# Altium PCB PCB1_1.pcbdoc
Units mil, origin at the board's own origin, x right, y up, seen from the top; angles counter-clockwise.
Board outline 3530.9 x 1977.12 mil, 4 copper layers (Top Layer, Inner1, Inner2, Bottom Layer); 80 components, 53 nets, 345 pads, 105 vias.
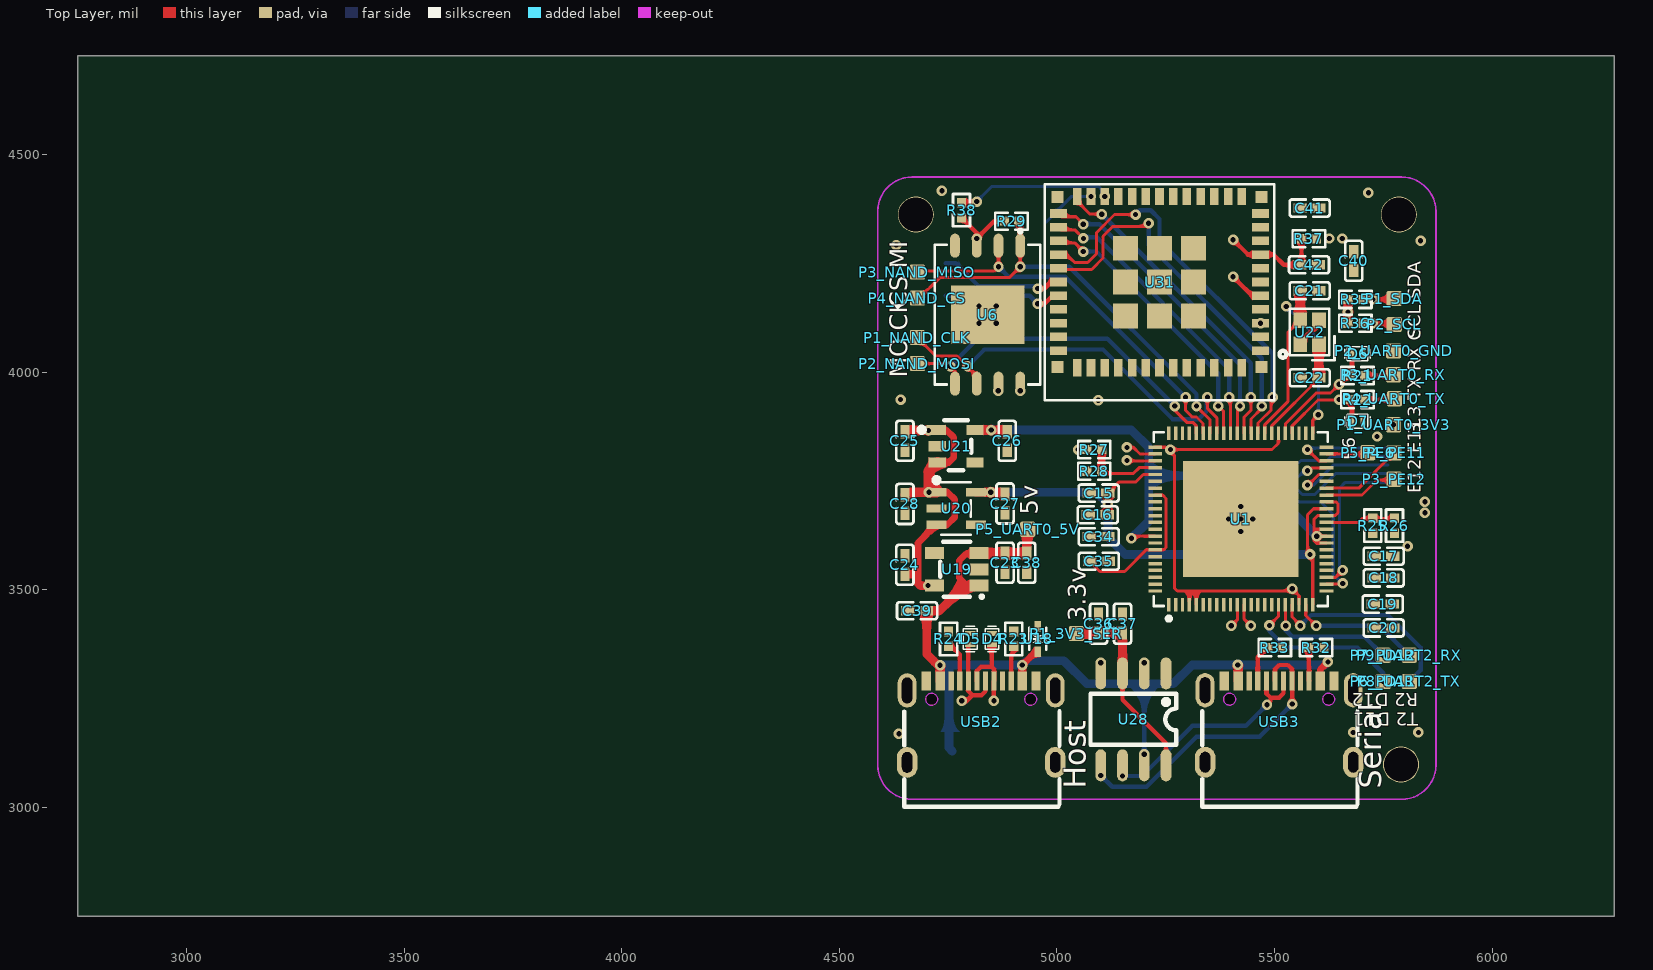
[diagram p0: Top Layer view]
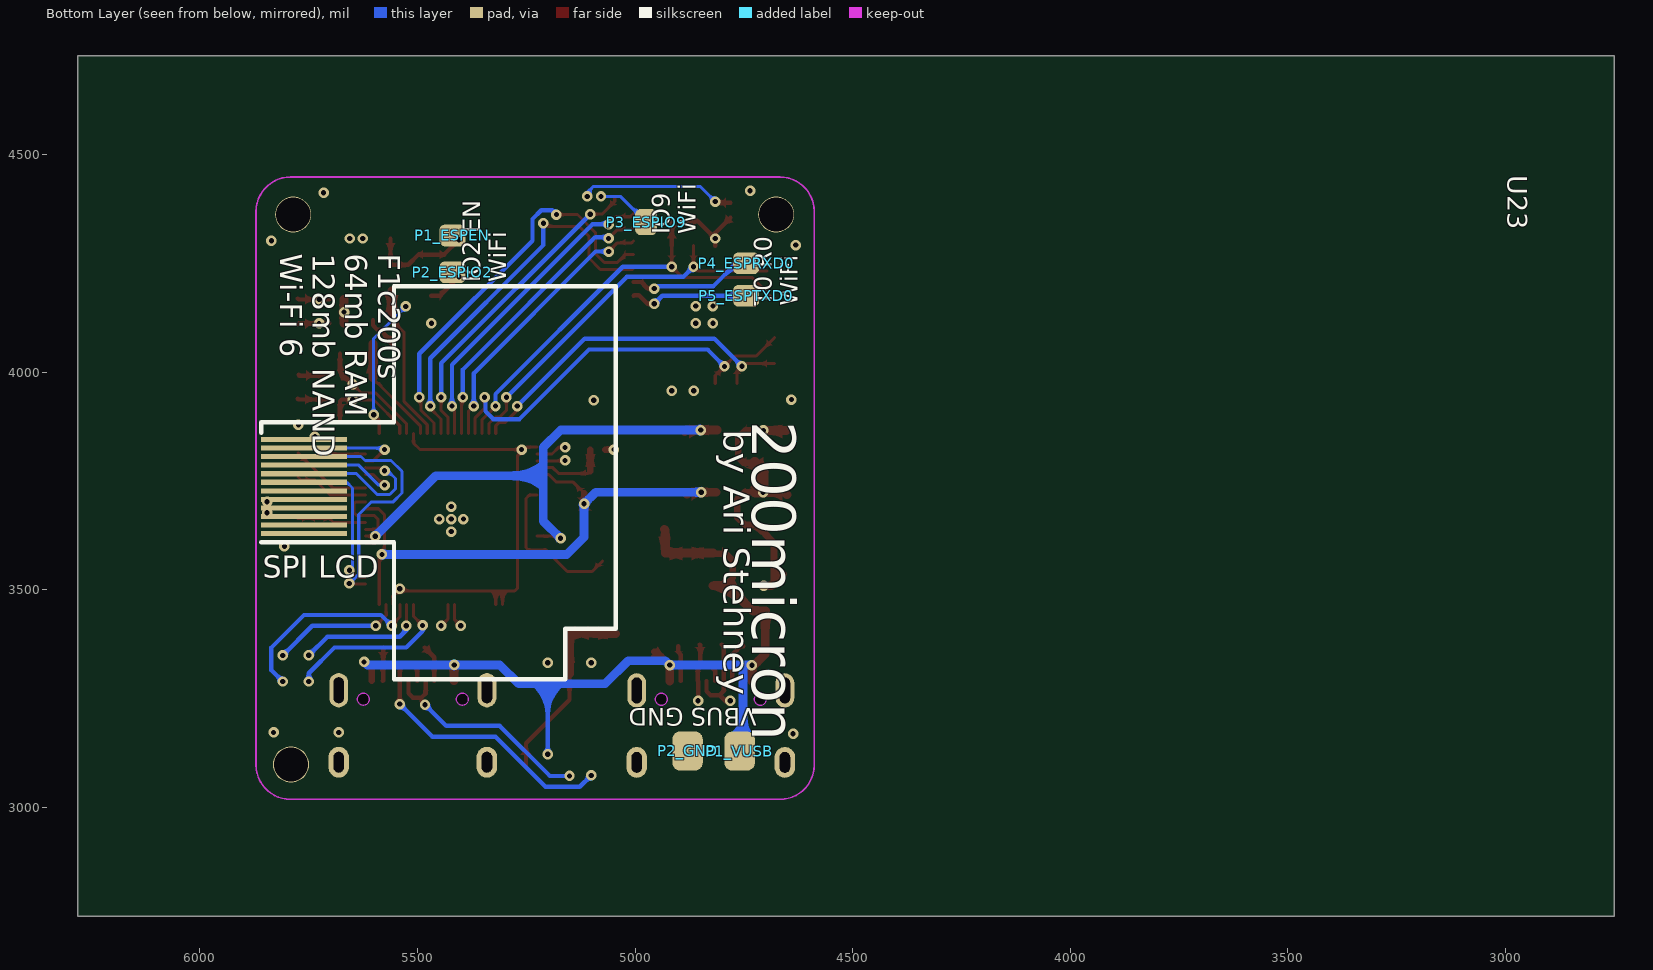
[diagram p1: Bottom Layer view, seen from below]
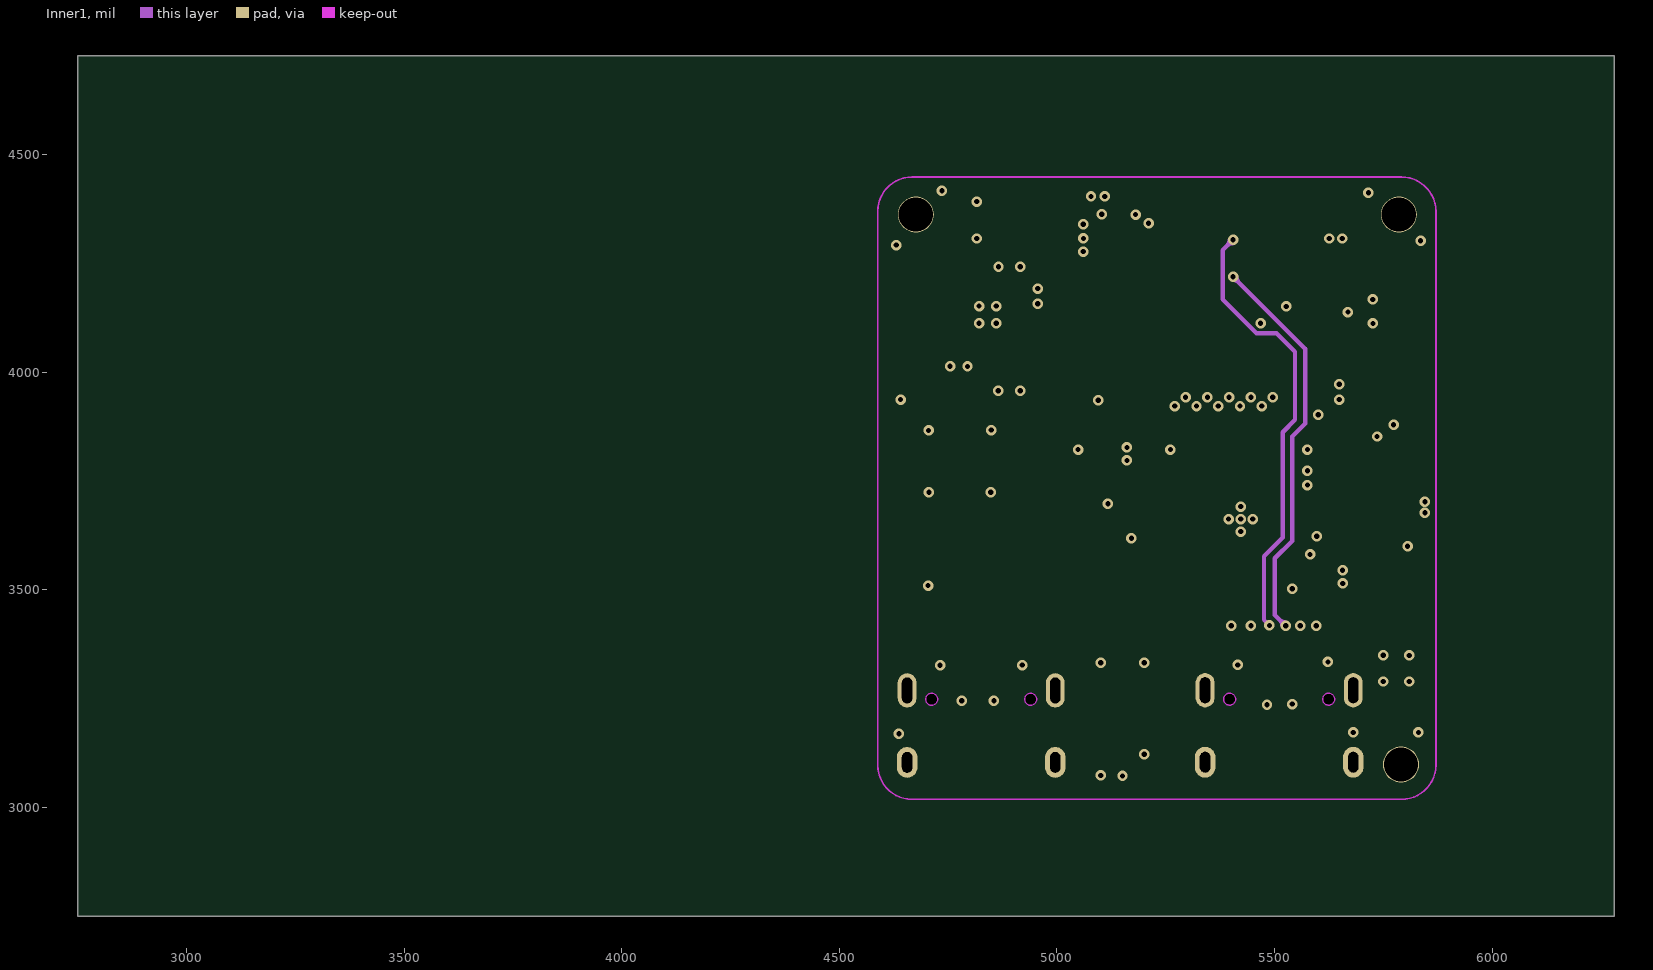
[diagram p2: Inner1]
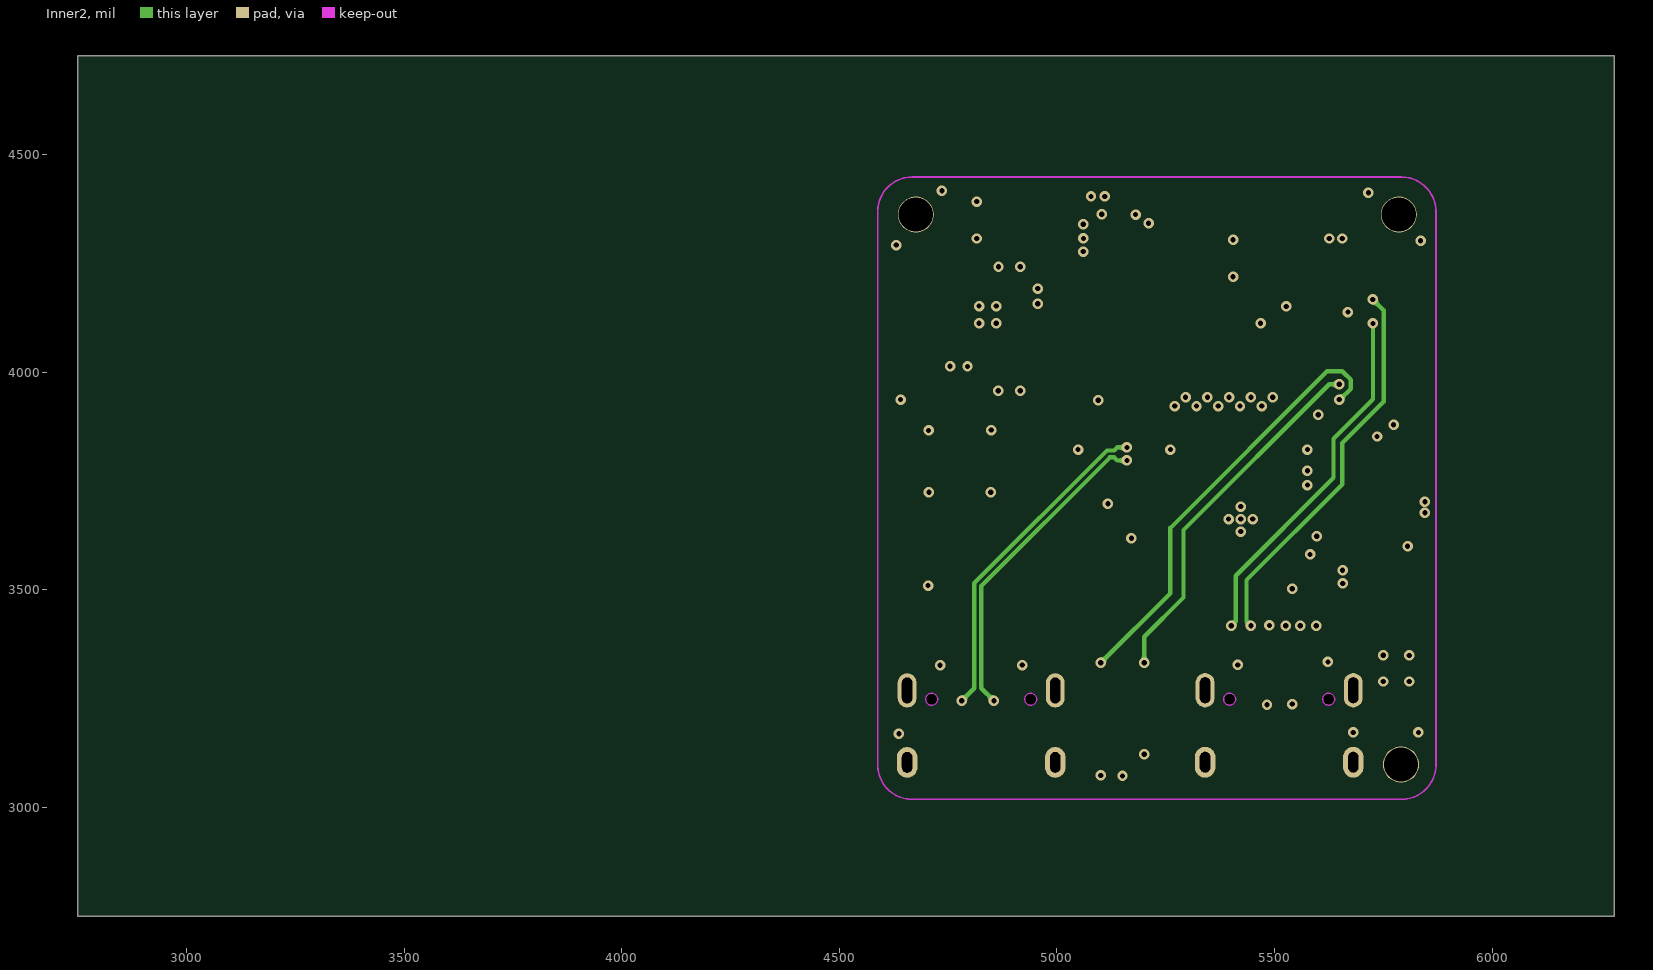
[diagram p3: Inner2]

## Layer stack, top to bottom
Top Layer: signal copper (thickness not stored)
Dielectric: dielectric 12.6, FR-4, Dk 4.8
Inner1: signal copper (thickness not stored)
Dielectric: dielectric 12.6, FR-4, Dk 4.8
Inner2: signal copper (thickness not stored)
Dielectric: dielectric 12.6, FR-4, Dk 4.8
Bottom Layer: signal copper (thickness not stored)

## Board outline
6280.9,2750 2750,2750 2750,4727.12 6280.9,4727.12

## Design rules (kind name [scope] priority, off if disabled: settings)
BoardOutlineClearance copperThickness1oz [All] p0: genericclearance=10 ignorepadtopadclearanceinfootprint=FALSE except(0: Arc-SplitContinuation Track-SplitContinuation SMDPad-SplitContinuation THPad-SplitContinuation Via-SplitContinuation Fill-SplitContinuation Poly-SplitContinuation Region-SplitContinuation Text-SplitContinuation; 6: Track-CutoutEdge SMDPad-CutoutEdge THPad-CutoutEdge Via-CutoutEdge Region-CutoutEdge; 11.8: Track-OutlineEdge SMDPad-OutlineEdge THPad-OutlineEdge Via-OutlineEdge Fill-OutlineEdge Region-OutlineEdge Poly-OutlineEdge Text-OutlineEdge Fill-CutoutEdge)
BoardOutlineClearance copperThickness2oz [All] p0: genericclearance=10 ignorepadtopadclearanceinfootprint=FALSE except(0: Arc-SplitContinuation Track-SplitContinuation SMDPad-SplitContinuation THPad-SplitContinuation Via-SplitContinuation Fill-SplitContinuation Poly-SplitContinuation Region-SplitContinuation Text-SplitContinuation; 6: Track-CutoutEdge SMDPad-CutoutEdge THPad-CutoutEdge Via-CutoutEdge Region-CutoutEdge; 11.8: Track-OutlineEdge SMDPad-OutlineEdge THPad-OutlineEdge Via-OutlineEdge Fill-OutlineEdge Region-OutlineEdge Poly-OutlineEdge Text-OutlineEdge Fill-CutoutEdge)
Clearance copperThickness1oz [(InNet('GND') OR InNet('1V1') OR InNet('2V5') OR InNet('HOSCO') OR InNet('HOSCI') OR InNet('3V3') OR InNet('USB_DP') OR InNet('USB_DM') OR InNet('UART0_RX') OR InNet('UART0_TX') OR InNet('SPI_LCD_RESET') OR InNet('SPI_LCD_CD') OR InNet('SPI1_MOSI') OR InNet('SPI1_CLK') OR InNet('SPI1_CS') OR InNet('SPI0_CLK') OR InNet('SPI0_MOSI') OR InNet('$1N1772') OR InNet('SPI0_MISO') OR InNet('$1N1777') OR InNet('SPI0_CS') OR InNet('$1N4860') OR InNet('$1N4861') OR InNet('SVREF') OR InNet('RESET') OR InNet('SPI1_MISO') OR InNet('SD_D2') OR InNet('SD_D3') OR InNet('SD_CMD') OR InNet('SD_CK') OR InNet('SD_D0') OR InNet('SD_D1') OR InNet('WIFI_EN') OR InNet('VBUS') OR InNet('PMIC_INT') OR InNet('$1N22407') OR InNet('$1N22408') OR InNet('USB_SERIAL_DM') OR InNet('USB_SERIAL_DP') OR InNet('3V3_SER') OR InNet('I2C0_SCL') OR InNet('I2C0_SDA') OR InNet('GPIO_PE12') OR InNet('GPIO_PE11') OR InNet('GPIO_PE6') OR InNet('UART2_TX') OR InNet('UART2_RX') OR InNet('C6_IO2') OR InNet('C6_EN') OR InNet('$1N25036') OR InNet('C6_IO9') OR InNet('C6_RXD0') OR InNet('C6_TXD0'))] p1: gap=7 ignorepadtopadclearanceinfootprint=FALSE except(4: Track-Track; 6: Track-SMDPad SMDPad-SMDPad Track-THPad SMDPad-THPad THPad-THPad Track-Via SMDPad-Via THPad-Via Via-Via SMDPad-Fill THPad-Fill Via-Fill Fill-Fill Track-Region SMDPad-Region THPad-Region Via-Region Region-Region Track-Poly SMDPad-Poly THPad-Poly Via-Poly Fill-Poly Region-Poly Poly-Poly Track-Text SMDPad-Text THPad-Text Via-Text Fill-Text Region-Text Poly-Text Text-Text; 6.9: Track-Hole SMDPad-Hole THPad-Hole Via-Hole Fill-Hole Region-Hole Poly-Hole Text-Hole Sheet-Hole; 11.8: Track-Fill Fill-Region Track-Sheet SMDPad-Sheet THPad-Sheet Via-Sheet Fill-Sheet Region-Sheet Poly-Sheet Text-Sheet)
Clearance copperThickness2oz [All] p1: gap=7 ignorepadtopadclearanceinfootprint=FALSE except(6: Track-SMDPad SMDPad-SMDPad Track-THPad SMDPad-THPad THPad-THPad Track-Via SMDPad-Via THPad-Via Via-Via SMDPad-Fill THPad-Fill Via-Fill Fill-Fill Track-Region SMDPad-Region THPad-Region Via-Region Region-Region Track-Poly SMDPad-Poly THPad-Poly Via-Poly Fill-Poly Region-Poly Poly-Poly Track-Text SMDPad-Text THPad-Text Via-Text Fill-Text Region-Text Poly-Text Text-Text; 6.9: Track-Hole SMDPad-Hole THPad-Hole Via-Hole Fill-Hole Region-Hole Poly-Hole Text-Hole Sheet-Hole; 8: Track-Track; 11.8: Track-Fill Fill-Region Track-Sheet SMDPad-Sheet THPad-Sheet Via-Sheet Fill-Sheet Region-Sheet Poly-Sheet Text-Sheet)
DiffPairsRouting differentialPair [All] p1: maxuncoupledlength=10 minlimit=6 maxlimit=6 mostfreqgap=6 toplayer_minwidth=5 toplayer_prefwidth=10 toplayer_maxwidth=100 bottomlayer_minwidth=5 bottomlayer_prefwidth=10 bottomlayer_maxwidth=100 midlayer1_minwidth=5 midlayer1_prefwidth=10 midlayer1_maxwidth=100 midlayer2_minwidth=5 midlayer2_prefwidth=10 midlayer2_maxwidth=100
PasteMaskExpansion pasteMaskExpansion [All] p1: expansion=0
PlaneConnect innerPlane [All] p1: planeconnectstyle=Relief reliefexpansion=20 reliefentries=4 reliefconductorwidth=10 reliefairgap=10
PolygonConnect copperRegion [All] p1: connectstyle=Direct reliefentries=4 reliefconductorwidth=10 polygonreliefangle="90 Angle" airgapwidth=10
RoutingVias viaSize [All] p1: viastyle="Through Hole" holewidth=12.0078 minholewidth=11.811 maxholewidth=248.0314 width=24.0158 minwidth=19.685 maxwidth=393.7008
SolderMaskExpansion solderMaskExpansion [All] p1: useseparateexpansions=TRUE expansion=2 expansionbottom=2
Width copperThickness1oz [All] p1: maxlimit=100 minlimit=5 preferedwidth=10
Width copperThickness2oz [All] p1: maxlimit=100 minlimit=8 preferedwidth=10

## Components (designator, comment, footprint, x,y, rotation, side; value= is the part's Value field where it differs from the comment)
C15 "CAP_0402" C0402 5095.9,3722.12 r180 top
C16 "CAP_0402" C0402 5093.82,3672.12 r180 top
C17 "CAP_0402" C0402 5750.9,3577.12 r0 top
C18 "CAP_0402" C0402 5750.9,3527.12 r0 top
C19 "CAP_0402" C0402 5748.82,3467.12 r0 top
C20 "CAP_0402" C0402 5750.9,3412.12 r0 top
C21 "CAP_0402" C0402 5580.9,4187.12 r0 top
C22 "CAP_0402" C0402 5580.9,3987.12 r180 top
C23 "CAP_0402" C0402 4880.9,3562.12 r270 top
C24 "CAP_0402" C0402 4650.9,3557.12 r90 top
C25 "CAP_0402" C0402 4650.9,3842.12 r270 top
C26 "CAP_0402" C0402 4885.9,3842.12 r270 top
C27 "CAP_0402" C0402 4880.9,3698.16 r270 top
C28 "CAP_0402" C0402 4650.9,3697.12 r270 top
C34 "CAP_0402" C0402 5095.9,3622.12 r180 top
C35 "CAP_0402" C0402 5096.62,3565.67 r180 top
C36 "CAP_0402" C0402 5095.9,3422.12 r90 top
C37 "CAP_0402" C0402 5150.9,3422.12 r90 top
C38 "CAP_0402" C0402 4930.9,3562.12 r270 top
C39 "CAP_0402" C0402 4678.7,3451.54 r180 top
C40 "CAP_0402" C0402 5682.36,4255.66 r270 top
C41 "CAP_0402" C0402 5580.9,4377.12 r180 top
C42 "CAP_0402" C0402 5579.36,4246.59 r0 top
D4 "LESD8D3.3CAT5G_C172409" SOD-882_L1.0-W0.6-BI 4851.14,3386.88 r270 top
D5 "LESD8D3.3CAT5G_C172409" SOD-882_L1.0-W0.6-BI 4801.14,3386.88 r270 top
D6 "LESD8D3.3CAT5G_C172409" SOD-882_L1.0-W0.6-BI 5690.9,4042.12 r180 top
D7 "LESD8D3.3CAT5G_C172409" SOD-882_L1.0-W0.6-BI 5690.9,3887.12 r180 top
P1_3V3_SER "PAD 1.5x1.5" FCPAD_1.5_1.0mm#1 5044.9,3404.17 r0 top
P1_ESPEN "PAD 1.5x1.5" FCPAD_1.5_1.0mm#2 5414.89,4314.17 r270 bottom
P1_NAND_CLK "PAD 1.5x1.5" FCPAD_1.5_1.0mm#1 4679.56,4084.41 r0 top
P1_SDA "PAD 1.5x1.5" FCPAD_1.5_1.0mm#1 5775.11,4174.23 r0 top
P1_UART0_3V3 "PAD 1.5x1.5" FCPAD_1.5_1.0mm#1 5768.7,3878.91 r90 top
P1_VUSB "PAD 1.5x1.5" FCPAD_1.5_1.0mm#3 4759.9,3134.17 r180 bottom
P2_ESPIO2 "PAD 1.5x1.5" FCPAD_1.5_1.0mm#2 5414.89,4229.49 r270 bottom
P2_GND "PAD 1.5x1.5" FCPAD_1.5_1.0mm#3 4879.58,3134.49 r180 bottom
P2_NAND_MOSI "PAD 1.5x1.5" FCPAD_1.5_1.0mm#1 4679.56,4024.73 r0 top
P2_SCL "PAD 1.5x1.5" FCPAD_1.5_1.0mm#1 5775.11,4114.54 r0 top
P2_UART0_GND "PAD 1.5x1.5" FCPAD_1.5_1.0mm#1 5768.7,4048.91 r90 top
P3_ESPIO9 "PAD 1.5x1.5" FCPAD_1.5_1.0mm#2 4974.9,4349.8 r180 bottom
P3_NAND_MISO "PAD 1.5x1.5" FCPAD_1.5_1.0mm#1 4679.56,4235.04 r0 top
P3_PE12 "PAD 1.5x1.5" FCPAD_1.5_1.0mm#1 5774.9,3759.17 r0 top
P3_UART0_RX "PAD 1.5x1.5" FCPAD_1.5_1.0mm#1 5768.39,3993.91 r90 top
P4_ESPRXD0 "PAD 1.5x1.5" FCPAD_1.5_1.0mm#2 4739.89,4250.12 r270 bottom
P4_NAND_CS "PAD 1.5x1.5" FCPAD_1.5_1.0mm#1 4679.56,4175.36 r0 top
P4_PE11 "PAD 1.5x1.5" FCPAD_1.5_1.0mm#1 5774.9,3819.49 r0 top
P4_UART0_TX "PAD 1.5x1.5" FCPAD_1.5_1.0mm#1 5770.7,3938.91 r90 top
P5_ESPTXD0 "PAD 1.5x1.5" FCPAD_1.5_1.0mm#2 4739.89,4175.43 r270 bottom
P5_PE6 "PAD 1.5x1.5" FCPAD_1.5_1.0mm#1 5714.9,3819.8 r0 top
P5_UART0_5V "PAD 1.5x1.5" FCPAD_1.5_1.0mm#1 4928.01,3638.91 r90 top
P6_PD11 "PAD 1.5x1.5" FCPAD_1.5_1.0mm#1 5749.9,3294.17 r0 top
P7_PD12 "PAD 1.5x1.5" FCPAD_1.5_1.0mm#1 5749.9,3354.49 r0 top
P8_UART2_TX "PAD 1.5x1.5" FCPAD_1.5_1.0mm#1 5809.9,3294.17 r0 top
P9_UART2_RX "PAD 1.5x1.5" FCPAD_1.5_1.0mm#1 5809.9,3354.49 r0 top
R21 "Res_0402" R0402 5690.9,3992.12 r0 top
R22 "Res_0402" R0402 5690.9,3937.12 r0 top
R23 "Res_0402" R0402 4901.14,3386.88 r90 top
R24 "Res_0402" R0402 4751.14,3386.88 r270 top
R25 "Res_0402" R0402 5725.9,3647.12 r270 top
R26 "Res_0402" R0402 5775.9,3647.12 r90 top
R27 "Res_0402" R0402 5085.9,3822.12 r180 top
R28 "Res_0402" R0402 5085.9,3772.12 r0 top
R29 "Res_0402" R0402 4895.9,4347.12 r0 top
R32 "Res_0402" R0402 5595.9,3367.12 r0 top
R33 "Res_0402" R0402 5500.9,3367.12 r180 top
R35 "Res_0402" R0402 5685.9,4167.12 r180 top
R36 "Res_0402" R0402 5685.9,4112.12 r0 top
R37 "Res_0402" R0402 5579.36,4306.54 r0 top
R38 "Res_0402" R0402 4780.9,4372.12 r270 top
U1 "F1C200S" QFN-88_L10.0-W10.0-P0.40-BL-EP6.75 5422.66,3662.49 r0 top
U6 "W25N01GVZEIG" WSON-8_L8.0-W6.10-P1.27-BL-EP 4840.9,4132.12 r180 top
U18 "LESD5D5.0CT1G_C7433850" SOD-523_L1.2-W0.8-LS1.6-BI 4956.14,3386.88 r270 top
U19 "XC6210B332MR" TSOT-23-5_L2.9-W1.6-P0.95-LS2.8-BR 4770.01,3546.86 r0 top
U20 "TLV71311PDBVR" SOT-23-5_L3.0-W1.7-P0.95-LS2.8-BL 4768.51,3686.71 r270 top
U21 "TLV70225DBVR" SOT-23-5_L2.9-W1.6-P0.95-LS2.8-BR 4768.4,3829.62 r180 top
U22 "ECS-240-12-37B-CKY-TR" CRYSTAL-SMD_4P-L2.0-W1.6-BL 5580.9,4092.12 r90 top
U23 "HS20HS072RX" OLED-SMD_HS20HS072RX 5760.9,3737.12 r270 bottom
U28 "PL2303GL" SOP-8_L4.9-W3.9-P1.27-LS6.0-BL 5175.9,3202.12 r180 top
U31 "ESP32-C6-MINI-1U-H4" WIFIM-SMD_61P-L13.2-W12.5-P0.80 5235.9,4207.12 r180 top
USB2 "TYPE-C 16PIN 2MD(073)" USB-C-SMD_TYPE-C-6PIN-2MD-073 4826.14,3196.88 r0 top
USB3 "TYPE-C 16PIN 2MD(073)" USB-C-SMD_TYPE-C-6PIN-2MD-073 5510.9,3197.12 r0 top

## Footprints (in the part's own frame and the unit in brackets; to place one, negate y for a bottom-side part, rotate by r counter-clockwise, add the part's x,y. Pads: shape width x height; smd on the part's side, far side on the other; paste and mask are expansions set on the pad)
C0402 [mm]
  rect 0.79x0.54 smd: 1(-0.545,0) 2(0.545,0)
  silkscreen extent -1.17,-0.5 1.17,0.5
CRYSTAL-SMD_4P-L2.0-W1.6-BL [mm]
  rect 0.9x0.8 smd: 1(-0.7,-0.55) 2(0.7,-0.55) 3(0.7,0.55) 4(-0.7,0.55)
  silkscreen extent -1.65,-1.45 1.35,1.15
FCPAD_1.5_1.0mm#1 [mil]
  rrect25% 35x35 smd: 1(0,-5)
FCPAD_1.5_1.0mm#2 [mil]
  rrect50% 50x60 smd: 1(0,-5)
FCPAD_1.5_1.0mm#3 [mil]
  rrect50% 70x90 smd: 1(0,-5)
OLED-SMD_HS20HS072RX [mm]
  rect 0.3x5 smd: 1(-2.75,0) 2(-2.25,0) 3(-1.75,0) 4(-1.25,0) 5(-0.75,0) 6(-0.25,0) 7(0.25,0) 8(0.75,0) 9(1.25,0) 10(1.75,0) 11(2.25,0) 12(2.75,0)
  silkscreen extent -11.7,-2.5 11.25,18.2
QFN-88_L10.0-W10.0-P0.40-BL-EP6.75 [mm]
  rect 0.2x0.8 smd: 1(-4.2,-5) 2(-3.8,-5) 3(-3.4,-5) 4(-3,-5) 5(-2.6,-5) 6(-2.2,-5) 7(-1.8,-5) 8(-1.4,-5) 9(-1,-5) 10(-0.6,-5) 11(-0.2,-5) 12(0.2,-5) 13(0.6,-5) 14(1,-5) 15(1.4,-5) 16(1.8,-5) 17(2.2,-5) 18(2.6,-5) 19(3,-5) 20(3.4,-5) 21(3.8,-5) 22(4.2,-5) 45(4.2,5) 46(3.8,5) 47(3.4,5) 48(3,5) 49(2.6,5) 50(2.2,5) 51(1.8,5) 52(1.4,5) 53(1,5) 54(0.6,5) 55(0.2,5) 56(-0.2,5) 57(-0.6,5) 58(-1,5) 59(-1.4,5) 60(-1.8,5) 61(-2.2,5) 62(-2.6,5) 63(-3,5) 64(-3.4,5) 65(-3.8,5) 66(-4.2,5)
  rect 0.8x0.2 smd: 23(5,-4.2) 24(5,-3.8) 25(5,-3.4) 26(5,-3) 27(5,-2.6) 28(5,-2.2) 29(5,-1.8) 30(5,-1.4) 31(5,-1) 32(5,-0.6) 33(5,-0.2) 34(5,0.2) 35(5,0.6) 36(5,1) 37(5,1.4) 38(5,1.8) 39(5,2.2) 40(5,2.6) 41(5,3) 42(5,3.4) 43(5,3.8) 44(5,4.2) 67(-5,4.2) 68(-5,3.8) 69(-5,3.4) 70(-5,3) 71(-5,2.6) 72(-5,2.2) 73(-5,1.8) 74(-5,1.4) 75(-5,1) 76(-5,0.6) 77(-5,0.2) 78(-5,-0.2) 79(-5,-0.6) 80(-5,-1) 81(-5,-1.4) 82(-5,-1.8) 83(-5,-2.2) 84(-5,-2.6) 85(-5,-3) 86(-5,-3.4) 87(-5,-3.8) 88(-5,-4.2)
  rect 6.75x6.75 smd: 89(0,0)
  silkscreen extent -5.08,-5.93 5.08,5.08
R0402 [mm]
  rect 0.566x0.54 smd: 1(-0.433,0) 2(0.433,0)
  silkscreen extent -0.94,-0.5 0.94,0.5
SOD-523_L1.2-W0.8-LS1.6-BI [mm]
  rect 0.6x0.4 smd: 1(-0.75,0) 2(0.75,0)
  silkscreen extent -0.65,-0.5 0.65,0.5
SOD-882_L1.0-W0.6-BI [mm]
  rect 0.3x0.6 smd: 1(-0.325,0) 2(0.325,0)
  silkscreen extent -0.75,-0.4 0.75,0.4
SOP-8_L4.9-W3.9-P1.27-LS6.0-BL [mm]
  oval 0.63x1.865 smd: 1(-1.905,-2.682) 2(-0.635,-2.682) 3(0.635,-2.682) 4(1.905,-2.682) 5(1.905,2.682) 6(0.635,2.682) 7(-0.635,2.682) 8(-1.905,2.682)
  silkscreen extent -2.5,-1.5 2.5,1.48
SOT-23-5_L2.9-W1.6-P0.95-LS2.8-BR [mm]
  rect 1x0.6 smd: 1(1.1,-0.95) 2(1.1,0) 3(1.1,0.95) 4(-1.1,0.95) 5(-1.1,-0.95)
  silkscreen extent -0.89,-1.52 2.16,1.4
SOT-23-5_L3.0-W1.7-P0.95-LS2.8-BL [mm]
  rect 0.49x1.157 smd: 1(-0.95,-1.154) 2(0,-1.154) 3(0.95,-1.154)
  rect 0.49x1.175 smd: 4(0.95,1.154) 5(-0.95,1.154)
  silkscreen extent -1.8,-1.29 1.53,0.85
TSOT-23-5_L2.9-W1.6-P0.95-LS2.8-BR [mm]
  rect 1.1x0.7 smd: 1(1.294,-0.951) 2(1.294,-0.001) 3(1.294,0.951) 4(-1.294,0.951) 5(-1.294,-0.949)
  silkscreen extent -0.97,-1.65 1.52,1.61
USB-C-SMD_TYPE-C-6PIN-2MD-073 [mm]
  rect 0.55x1.1 smd: 1(-3.2,2.375) 2(-2.4,2.375) 11(2.4,2.375) 12(3.2,2.375)
  rect 0.3x1.1 smd: 3(-1.75,2.375) 4(-1.25,2.375) 5(-0.75,2.375) 6(-0.25,2.375) 7(0.25,2.375) 8(0.75,2.375) 9(1.25,2.375) 10(1.75,2.375)
  oval 1.2x1.8 hole 0.6 slot 1.2 at 90 deg: 13(-4.325,-2.375) 14(4.325,-2.375)
  oval 1.1x2 hole 0.6 slot 1.5 at 90 deg: 13(-4.325,1.825) 14(4.325,1.825)
  Board Outline Layer circle w0.005: c-2.89,1.305 r0.35
  Board Outline Layer circle w0.005: c2.89,1.305 r0.35
  Board Outline Layer region: -2.54,1.305 -2.575,1.153 -2.672,1.031 -2.812,0.964 -2.968,0.964 -3.108,1.031 -3.205,1.153 -3.24,1.305 -3.24,1.305 -3.205,1.457 -3.108,1.579 -2.968,1.646 -2.812,1.646 -2.672,1.579 -2.575,1.457 -2.54,1.305
  Board Outline Layer region: 3.24,1.305 3.205,1.153 3.108,1.031 2.968,0.964 2.812,0.964 2.672,1.031 2.575,1.153 2.54,1.305 2.54,1.305 2.575,1.457 2.672,1.579 2.812,1.646 2.968,1.646 3.108,1.579 3.205,1.457 3.24,1.305
  Multi-Layer board cut-out: -2.54,1.305 -2.575,1.153 -2.672,1.031 -2.812,0.964 -2.968,0.964 -3.108,1.031 -3.205,1.153 -3.24,1.305 -3.24,1.305 -3.205,1.457 -3.108,1.579 -2.968,1.646 -2.812,1.646 -2.672,1.579 -2.575,1.457 -2.54,1.305
  Multi-Layer board cut-out: 3.24,1.305 3.205,1.153 3.108,1.031 2.968,0.964 2.812,0.964 2.672,1.031 2.575,1.153 2.54,1.305 2.54,1.305 2.575,1.457 2.672,1.579 2.812,1.646 2.968,1.646 3.108,1.579 3.205,1.457 3.24,1.305
  silkscreen extent -4.5,-4.97 4.57,0.6
WIFIM-SMD_61P-L13.2-W12.5-P0.80 [mm]
  rect 1x0.5 smd: 1(-5.9,4) 2(-5.9,3.2) 3(-5.9,2.4) 4(-5.9,1.6) 5(-5.9,0.8) 6(-5.9,0) 7(-5.9,-0.8) 8(-5.9,-1.6) 9(-5.9,-2.4) 10(-5.9,-3.2) 11(-5.9,-4) 25(5.9,-4) 26(5.9,-3.2) 27(5.9,-2.4) 28(5.9,-1.6) 29(5.9,-0.8) 30(5.9,0) 31(5.9,0.8) 32(5.9,1.6) 33(5.9,2.4) 34(5.9,3.2) 35(5.9,4)
  rect 0.5x1 smd: 12(-4.8,-5) 13(-4,-5) 14(-3.2,-5) 15(-2.4,-5) 16(-1.6,-5) 17(-0.8,-5) 18(0,-5) 19(0.8,-5) 20(1.6,-5) 21(2.4,-5) 22(3.2,-5) 23(4,-5) 24(4.8,-5) 36(4.8,5) 37(4,5) 38(3.2,5) 39(2.4,5) 40(1.6,5) 41(0.8,5) 42(0,5) 43(-0.8,5) 44(-1.6,5) 45(-2.4,5) 46(-3.2,5) 47(-4,5) 48(-4.8,5)
  rect 1.45x1.45 smd: 49(0,0) 54(-1.975,1.975) 55(0,1.975) 56(1.975,1.975) 57(1.975,0) 58(1.975,-1.975) 59(0,-1.975) 60(-1.975,-1.975) 61(-1.975,0)
  rect 0.7x0.7 smd: 50(5.95,4.95) 51(5.95,-4.95) 52(-5.95,-4.95) 53(-5.95,4.95)
  silkscreen extent -7.4,-5.7 6.7,6.9
WSON-8_L8.0-W6.10-P1.27-BL-EP [mm]
  oval 0.56x1.4 smd: 1(-1.905,-4.027) 2(-0.635,-4.027) 3(0.635,-4.027) 4(1.905,-4.027) 5(1.905,4.027) 6(0.635,4.027) 7(-0.635,4.027) 8(-1.905,4.027)
  rect 4.3x3.4 smd: 9(0,0)
  silkscreen extent -3.08,-4.98 3.08,4.08

## Free pads (board coordinates)
  round 82.68 hole 78.74 unplated: 1(4675.9,4362.12) 1(5785.9,4362.12) 1(5790.91,3098.3)

## Via types
v1: diameter 24.02, hole 12.01, Top Layer to Bottom Layer, 101 vias
v2: diameter 24, hole 12, Top Layer to Bottom Layer, 4 vias

## Nets (pads, with @x,y where several pads share a name; then routed paths per layer and width w, separated by ;. In a path a pad name is that pad's centre, name@x,y a point inside that pad or via, vN(x,y) a via of type N, cw(c..) or ccw(c..) an arc to the next point about the centre after c; other vN are vias at no path point)
1V1: C15.1 C16.1 C19.1 C20.1 C27.1 U1.22 U1.35 U1.71 U20.5 | length 1345
  Top Layer w7: C15.1 5142.36,3747.12 5180.9,3747.12 5198.63,3764.85 U1.71 ; U1.22 5588.01,3575.01 v1(5581.92,3581.1) 5575.9,3587.12 5575.9,3672.12 5589.89,3686.11 U1.35
  Top Layer w15: C16.1 5117.36,3674.2 v1(5117.36,3697.46) C15.1
  Top Layer w20: U20.5 v1(4847.84,3724.11) 4876.4,3724.11 C27.1
  Bottom Layer w20: v1(4847.84,3724.11) 5090.71,3724.11 v1(5117.36,3697.46) 5117.47,3697.35 5117.47,3620.55 5156.92,3581.1 v1(5581.92,3581.1)
2V5: C17.1 C18.1 C26.1 C34.1 C35.1 R25.2 U1.30 U1.31 U1.32 U1.34 U1.36 U1.80 U21.5 | length 1427
  Top Layer w7: v1(5171.4,3618.12) 5176.4,3623.12 U1.80 ; v1@5591.22,3623.12 U1.31 ; U1.30 5595.9,3607.37 5590.95,3612.32 5590.95,3638.5 ; U1.32 5619.14,3638.5 5590.95,3638.5 ; U1.36 5619.77,3702.12 5640.9,3702.12 5645.9,3697.12 5645.9,3677.12 5639.14,3670.36 U1.34 5599.14,3670.36 5590.95,3662.17 5590.95,3638.5
  Top Layer w20: U21.5 v1(4849.21,3867.02) 4882.46,3867.02 C26.1
  Bottom Layer w20: v1(4849.21,3867.02) 4849.31,3867.12 5170.9,3867.12 5210.9,3827.12 5210.9,3762.12 ; v1(5171.4,3618.12) 5210.9,3657.61 5210.9,3762.12 ; v1(5597.39,3623.12) 5458.39,3762.12 5210.9,3762.12
3V3: C24.1 C25.1 C28.1 C40.1 C41.1 P1_UART0_3V3.1 R27.2 R29.1 R35.2 R36.1 R37.2 R38.2 U1.4 U1.5 U1.20 U1.50 U1.67 U6.3 U6.7 U6.8 U19.5 U20.1 U20.3 U21.1 U21.3 U23.8 U23.9 U23.10 U31.3 | length 1938.9
  Top Layer w7: U1.67 5250.18,3827.84 v1@5255.9,3822.12 ; U1.4 5304.55,3496.45 5305.22,3497.12 ; U1.5 5320.3,3497.12 ; U1.50 5509.27,3836.98 5494.41,3822.12 v1@5255.9,3822.12 ; U1.20 5556.52,3486.5 5545.9,3497.12 5320.3,3497.12 ; v1@5255.9,3822.12 5269.9,3808.12 5269.9,3504.12 5276.9,3497.12 5305.22,3497.12 ; 5305.22,3497.12 5320.3,3497.12
  Top Layer w10: R38.2 4815.9,4320.08 v1(4815.9,4307.12) ; U6.3 v1(4815.9,4307.12) ; R29.1 4855.9,4347.12 v1(4815.9,4307.12)
  Top Layer w15: 4677.45,3519.11 4680.9,3522.55 4680.9,3607.13 U20.3 4748.09,3649.31 4765.9,3667.12 4765.9,3707.12 4748.91,3724.11 U20.1 ; U21.3 4751,3792.22 4763.4,3804.62 4763.4,3849.62 4746,3867.01 U21.1 ; v1(5048.73,3822.12) R27.2
  Top Layer w20: C28.1 4656.43,3724.11 v1(4705.9,3724.11) ; C25.1@4653.4,3866.08 v1(4705.26,3866.08) ; C24.1@4660.9,3535.66 4677.45,3535.66 4677.45,3519.11 4687.06,3509.5 v1(4704.07,3509.5) ; R36.1 v1(5668.86,4137.97) R35.2
  Top Layer w25: U20.1 v1(4705.9,3724.11) 4705.9,3773.03 U21.3
  other v1: 5540.9,3502.12 5845.9,3677.12 5845.9,3702.12 5260.9,3822.12 5773.71,3878.91 4865.53,3957.41 4915.9,3957.41 5468.18,4112.63 5625.9,4307.12 5655.9,4307.12
3V3_SER: C36.1 C37.1 P1_3V3_SER.1 U28.3 U28.8 | length 447.2
  Top Layer w10: U28.3 5150.9,3247.12 5250.9,3147.12 U28.8
  Top Layer w20: P1_3V3_SER.1 5094.41,3399.17 C36.1 C37.1 ; U28.3 C37.1@5150.9,3395.66
$1N1772: P3_UART0_RX.1 R21.2 | length 66.2
  Top Layer w10: R21.2 5771.6,3992.12 P3_UART0_RX.1
$1N1777: P4_UART0_TX.1 R22.2 | length 68.5
  Top Layer w10: R22.2 5773.91,3937.12 P4_UART0_TX.1
$1N4860: R23.1 USB2.10 | length 82
  Top Layer w10: USB2.10 4895.04,3350.79 4901.14,3356.88 R23.1
$1N4861: R24.2 USB2.4 | length 94.3
  Top Layer w10: R24.2 4758.18,3369.84 4776.93,3351.09 USB2.4
$1N22407: R32.1 USB3.10 | length 76.9
  Top Layer w10: R32.1 5578.86,3291.57 USB3.10
$1N22408: R33.2 USB3.4 | length 85.7
  Top Layer w10: USB3.4 5461.69,3344.95 R33.2
$1N25036: R38.1 U31.22 | length 359.7
  Top Layer w10: R38.1 4812.94,4389.16 v1(4815.9,4392.12)
  Bottom Layer w7: v1(4815.9,4392.12) 4850.9,4427.12 5095.9,4427.12 5109.91,4413.11 v1(5109.91,4403.97)
C6_EN: C42.1 P1_ESPEN.1 P6_PD11.1 R37.1 U1.17 U31.8 | length 1655.5
  Top Layer w7: v1(5488.53,3418.13) 5509.27,3438.87 U1.17
  Top Layer w10: v1(5404.89,4304.17) 5438.95,4270.11 U31.8 5497.9,4270.11 5521.43,4246.59 C42.1 5562.32,4251.01 R37.1
  Inner1 w10: v1(5404.89,4304.17) 5380.9,4280.18 5380.9,4167.4 5458.65,4089.64 5504.87,4089.64 5547.4,4047.12 5547.4,3890.62 5518.89,3862.12 5518.89,3620.11 5475.9,3577.12 5475.9,3430.76 v1(5488.53,3418.13)
  Bottom Layer w10: v1(5488.53,3418.13) 5488.53,3404.49 5525.9,3367.12 5690.9,3367.12 5749.9,3308.12 v1(5749.9,3289.17)
C6_IO2: P2_ESPIO2.1 P7_PD12.1 U1.18 U31.5 | length 1298.7
  Top Layer w7: U1.18 5525.9,3464.75 v1(5525.9,3417.12)
  Top Layer w10: v1(5404.89,4219.48) 5448.75,4175.62 U31.5
  Inner1 w10: v1(5404.89,4219.48) 5570.9,4053.48 5570.9,3882.12 5540.9,3852.12 5540.9,3612.12 5500.9,3572.12 5500.9,3442.12 v1(5525.9,3417.12)
  Bottom Layer w10: v1(5525.9,3417.12) 5525.9,3407.12 5540.9,3392.12 5707.26,3392.12 v1(5749.9,3349.48)
C6_IO9: P3_ESPIO9.1 U31.23 | length 128
  Bottom Layer w7: P3_ESPIO9.1 5034.07,4403.97 v1(5078.42,4403.97)
C6_RXD0: P4_ESPRXD0.1 U31.30 | length 289
  Top Layer w10: v1(4955.9,4192.12) 4970.9,4192.12 4985.9,4207.12 U31.30
  Bottom Layer w10: P4_ESPRXD0.1 4767.91,4250.11 4820.9,4197.12 4950.9,4197.12 v1(4955.9,4192.12)
C6_TXD0: P5_ESPTXD0.1 U31.31 | length 275.2
  Top Layer w10: v1(4955.9,4157.12) 4971.55,4157.12 4991.55,4177.12 5002.12,4177.12 U31.31
  Bottom Layer w10: P5_ESPTXD0.1 4937.59,4175.43 v1(4955.9,4157.12)
GND: C15.2 C16.2 C17.2 C18.2 C19.2 C20.2 C21.2 C22.2 C23.2 C24.2 C25.2 C26.2 C27.2 C28.2 C34.2 C35.2 C36.2 C37.2 C38.2 C39.2 C40.2 C41.2 C42.2 D4.1 D5.1 D6.1 D7.1 P2_GND.1 P2_UART0_GND.1 R23.2 R24.1 R26.1 R28.1 R32.2 R33.1 U1.74 U1.82 U1.89 U6.4 U18.1 U19.2 U20.2 U21.2 U22.2 U22.4 U23.1 U23.11 U23.12 U28.1 U31.1 U31.2 U31.11 U31.14 U31.36 U31.37 U31.38 U31.39 U31.40 U31.41 U31.42 U31.43 U31.44 U31.45 U31.46 U31.47 U31.48 U31.49 U31.50 U31.51 U31.52 U31.53 U31.54 U31.55 U31.56 U31.57 U31.58 U31.59 U31.60 U31.61 USB2.1 USB2.12 USB2.13 USB2.14 USB3.1 USB3.12 USB3.13 USB3.14 | length 425.8
  Top Layer w7: C35.2 5098.71,3542.12 5155.9,3542.12 5205.4,3591.62 U1.82 5245.4,3591.62 5251.04,3597.26 5251.04,3709.72 5243.15,3717.61 U1.74
  Top Layer w10: U22.4 5570.9,4076.21 5570.9,4081.91 5586.11,4097.12 5591.81,4097.12 5602.55,4107.86 U22.2
  other v1: 4637.12,3168.88 5680.9,3172.12 5830.9,3172.12 5805.9,3599.99 5422.66,3633.75 5394.59,3662.49 5422.66,3662.49 5450.42,3662.49 5422.66,3691.09 5735.9,3852.12 5095.38,3935.47 4640.9,3937.12 4630.9,4292.12 5835.9,4302.12 5715.9,4412.12 4735.9,4417.12
GPIO_PE6: P5_PE6.1 U1.43 | length 96.5
  Top Layer w7: U1.43 5712.2,3812.1 P5_PE6.1
GPIO_PE11: P4_PE11.1 U1.38 | length 189
  Top Layer w7: U1.38 5693.77,3733.36 P4_PE11.1
GPIO_PE12: P3_PE12.1 U1.37 | length 172.6
  Top Layer w7: U1.37 5701.39,3717.61 5735.9,3752.12 5767.85,3752.12 P3_PE12.1@5774.9,3759.17
HOSCI: C22.1 U1.51 U22.1 | length 248.8
  Top Layer w7: U1.51 5493.53,3876.69 C22.1@5602.36,3985.53
  Top Layer w20: C22.1 5602.36,4064.37 U22.1
HOSCO: C21.1 U1.52 U22.3 | length 361.6
  Top Layer w7: U1.52 5477.78,3879 5530.9,3932.12 5530.9,4091.33 U22.3
  Top Layer w20: U22.3 5559.25,4186.93 C21.1
I2C0_SCL: P2_SCL.1 R36.2 U1.11 | length 957.4
  Top Layer w7: v1(5400.9,3417.12) 5414.79,3431.01 U1.11
  Top Layer w10: R36.2 v1(5726.45,4112.12) 5772.53,4112.12 P2_SCL.1
  Inner2 w10: v1(5400.9,3417.12) 5410.9,3427.12 5410.9,3532.12 5635.9,3757.12 5635.9,3847.12 5726.45,3937.67 v1(5726.45,4112.12)
I2C0_SDA: P1_SDA.1 R35.1 U1.12 | length 1022.9
  Top Layer w7: U1.12 5430.53,3432.49 v1(5445.9,3417.12)
  Top Layer w10: R35.1 v1(5725.91,4167.12) 5773.01,4167.12 P1_SDA.1
  Inner2 w10: v1(5445.9,3417.12) 5435.9,3427.12 5435.9,3522.12 5655.9,3742.12 5655.9,3837.12 5750.9,3932.12 5750.9,4142.13 v1(5725.91,4167.12)
PMIC_INT: U1.14
RESET: R27.1 R28.2 U1.70 | length 180.5
  Top Layer w7: R28.2 5107.94,3767.12 5175.9,3767.12 5189.38,3780.6 U1.70
  Top Layer w15: R28.2 R27.1
SD_CK: U1.56 U31.25 | length 721.5
  Top Layer w7: U31.25 5011.1,4357.12 5043.89,4357.12 v1(5060.9,4340.11) ; U1.56 5414.79,3916.01 v1(5420.9,3922.12)
  Bottom Layer w10: v1(5060.9,4340.11) 5097.91,4340.11 5420.9,4017.12 v1(5420.9,3922.12)
SD_CMD: U1.55 U31.24 | length 732
  Top Layer w7: U31.24 5046.92,4392.53 5076.35,4363.1 v1(5103.13,4363.1) ; U1.55 5430.53,3896.75 5445.9,3912.12 v1(5445.9,3942.12)
  Bottom Layer w10: v1(5103.13,4363.1) 5445.9,4020.33 v1(5445.9,3942.12)
SD_D0: U1.57 U31.26 | length 678.4
  Top Layer w7: U31.26 5009.6,4327.12 5041.29,4327.12 v1(5061.1,4307.32) ; v1(5395.9,3942.12) 5399.04,3938.98 U1.57
  Bottom Layer w10: v1(5061.1,4307.32) 5064.12,4310.34 5091.82,4310.34 5395.9,4006.26 v1(5395.9,3942.12)
SD_D1: U1.58 U31.27 | length 636.3
  Top Layer w7: U31.27 5008.1,4297.12 5040.9,4297.12 v1(5060.9,4277.12) ; v1(5370.9,3922.12) 5383.29,3909.73 U1.58
  Bottom Layer w10: v1(5060.9,4277.12) 5090.9,4277.12 5370.9,3997.12 v1(5370.9,3922.12)
SD_D2: U1.53 U31.28 | length 940.8
  Top Layer w7: U31.28 5022.9,4270.11 5040.9,4252.12 5070.9,4252.12 5090.9,4272.12 5090.9,4320.48 5132.54,4362.12 v1(5180.9,4362.12) ; U1.53 5462.03,3883.25 5479.41,3900.63 5479.8,3900.63 5492.39,3913.22 5492.39,3938.61 v1(5495.9,3942.12)
  Bottom Layer w10: v1(5180.9,4362.12) 5190.9,4372.12 5215.9,4372.12 5235.9,4352.12 5235.9,4302.12 5495.9,4042.12 v1(5495.9,3942.12)
SD_D3: U1.54 U31.29 | length 882.2
  Top Layer w7: U31.29 5006.13,4236.1 5079.88,4236.1 5105.9,4262.12 5105.9,4312.12 5128.9,4335.12 5203.9,4335.12 v1(5210.9,4342.12) ; U1.54 5446.28,3892.5 5470.9,3917.12 v1(5470.9,3922.12)
  Bottom Layer w10: v1(5210.9,4342.12) 5210.9,4292.12 5470.9,4032.12 v1(5470.9,3922.12)
SPI0_CLK: P1_NAND_CLK.1 U1.59 U6.6 | length 954.6
  Top Layer w7: P1_NAND_CLK.1 4721.86,4037.12 4770.9,4037.12 v1(4794.71,4013.31) 4815.9,3992.12 U6.6 ; v1(5345.9,3942.12) 5345.9,3916.72 5367.54,3895.09 U1.59
  Bottom Layer w10: v1(4794.71,4013.31) 4833.53,4052.12 5105.9,4052.12 5265.9,3892.12 5325.9,3892.12 5343.89,3910.11 5343.89,3940.11 v1(5345.9,3942.12)
SPI0_CS: P4_NAND_CS.1 R29.2 U1.60 U6.1 | length 1001.8
  Top Layer w7: P4_NAND_CS.1 4684.13,4170.35 4730.9,4217.12 4890.9,4217.12 v1(4915.9,4242.12) U6.1 ; v1(5320.9,3922.12) 5320.61,3921.83 5351.79,3890.65 U1.60
  Top Layer w10: R29.2 4915.9,4344.16 U6.1
  Bottom Layer w10: v1(4915.9,4242.12) 5028.42,4242.12 5320.9,3949.64 v1(5320.9,3922.12)
SPI0_MISO: P3_NAND_MISO.1 U1.61 U6.2 | length 880.6
  Top Layer w7: 4697.49,4232.12 4855.9,4232.12 v1(4865.9,4242.12) U6.2 ; v1(5295.9,3942.12) 5295.9,3912.12 5310.9,3897.12 5320.8,3897.12 5336.05,3881.87 U1.61
  Bottom Layer w10: v1(4865.9,4242.12) 4888.89,4219.13 5018.89,4219.13 v1(5295.9,3942.12)
SPI0_MOSI: P2_NAND_MOSI.1 U1.62 U6.5 | length 820.4
  Top Layer w7: P2_NAND_MOSI.1 4748.3,4019.72 4765.9,4002.12 U6.5 ; v1(5270.9,3922.12) 5270.9,3912.22 5298.55,3884.57 5312.41,3884.57 5320.3,3876.68 U1.62
  Bottom Layer w10: v1(4754.6,4013.42) 4818.29,4077.12 5115.9,4077.12 v1(5270.9,3922.12)
SPI1_CLK: U1.40 U23.4 | length 257.7
  Top Layer w7: v1(5575.9,3740.42) 5577.73,3740.42 5602.16,3764.85 U1.40
  Bottom Layer w7: v1(5575.9,3740.42) 5589.2,3740.42 5635.11,3786.33 U23.4
SPI1_CS: U1.42 U23.2 | length 240.8
  Top Layer w7: v1(5575.9,3822.12) 5601.67,3796.35 U1.42
  Bottom Layer w7: v1(5575.9,3822.12) 5579.48,3825.7 U23.2
SPI1_MISO: U1.39
SPI1_MOSI: U1.41 U23.5 | length 337.7
  Top Layer w7: v1@5578.28,3773.2 5585.05,3779.96 5618.87,3779.96 U1.41
  Bottom Layer w7: v1@5578.28,3773.2 5568.38,3773.2 5550.9,3755.71 5550.9,3732.12 5564.07,3718.95 5592.73,3718.95 5640.43,3766.65 U23.5
  other v1: 5575.9,3773.2
SPI_LCD_CD: U1.24 U23.3 | length 614.3
  Top Layer w7: U1.24 5655.32,3512.88 v1(5656.84,3514.4)
  Bottom Layer w7: v1(5656.84,3514.4) 5648.14,3523.11 5647.74,3523.11 5635.15,3535.7 5635.15,3672.87 5605.9,3702.12 5555.9,3702.12 5535.9,3722.12 5535.9,3772.12 5560.9,3797.12 5620.9,3797.12 5629.8,3806.02 U23.3
SPI_LCD_RESET: U1.25 U23.6 | length 352.5
  Top Layer w7: U1.25 5640.67,3528.63 v1(5656.65,3544.6)
  Bottom Layer w7: v1(5656.65,3544.6) 5649.65,3551.6 5649.65,3733.77 5662.84,3746.96 U23.6
SVREF: R25.1 R26.2 U1.33 | length 160.3
  Top Layer w7: U1.33 5693.4,3654.62 5702.94,3664.16 R25.1 R26.2
UART0_RX: D6.2 R21.1 U1.49 U28.2 | length 1104.5
  Top Layer w7: U1.49 5525.9,3860.22 5525.9,3882.12 5595.9,3952.12 5628.86,3952.12 v1(5648.86,3972.12)
  Top Layer w10: v1(5648.86,3972.12) 5678.1,4001.36 D6.2
  Inner2 w10: v1(5200.9,3332.12) 5200.9,3392.12 5290.9,3482.12 5290.9,3637.12 5625.9,3972.12 v1(5648.86,3972.12)
UART0_TX: D7.2 R22.1 U1.48 U28.4 | length 1232.8
  Top Layer w7: U1.48 5540.9,3859.47 5540.9,3876.82 5600.19,3936.1 5648.14,3936.1 v1(5649.15,3937.12)
  Top Layer w10: v1(5649.15,3937.12) R22.1 5678.1,3932.87 D7.2
  Inner2 w10: v1(5100.9,3332.12) 5260.9,3492.12 5260.9,3642.12 5620.9,4002.12 5655.9,4002.12 5675.69,3982.33 5675.69,3961.91 5650.9,3937.12 v1(5649.15,3937.12)
UART2_RX: P9_UART2_RX.1 U1.21 | length 300.5
  Top Layer w7: U1.21 5572.27,3440.75 v1(5595.9,3417.12)
  Bottom Layer w10: v1(5595.9,3417.12) 5741.95,3417.12 v1(5809.9,3349.17)
UART2_TX: P8_UART2_TX.1 U1.19 | length 463.1
  Top Layer w7: U1.19 5540.77,3437.25 5559.21,3418.81 v1(5559.21,3417.07)
  Bottom Layer w10: v1(5559.21,3417.07) 5584.26,3442.12 5760.9,3442.12 5835.9,3367.12 5835.9,3315.17 v1(5809.9,3289.17)
USB_DM: D5.2 U1.68 USB2.5 USB2.7 | length 1042.8
  Top Layer w7: v1(5160.9,3827.12) 5175.9,3827.12 5190.9,3812.12 U1.68
  Top Layer w10: v1(4781.34,3244.88) 4792.96,3244.88 4805.84,3257.75 ; D5.2 4796.61,3369.56 USB2.5 4796.14,3289.91 4796.14,3267.45 4805.84,3257.75 ; USB2.7 4835.98,3266.99 4826.75,3257.75 4805.84,3257.75
  Inner2 w10: v1(4781.34,3244.88) 4810.33,3273.87 4810.33,3515.19 5115.26,3820.12 5131.89,3820.12 5138.89,3827.12 v1(5160.9,3827.12)
USB_DP: D4.2 U1.69 USB2.6 USB2.8 | length 994.3
  Top Layer w7: v1(5160.9,3797.12) 5170.9,3797.12 5171.67,3796.35 U1.69
  Top Layer w10: USB2.6 4816.29,3313.79 4825.53,3323.03 4849.99,3323.03 ; D4.2 4849.99,3372.95 4849.99,3323.03 ; v1(4855.32,3244.88) 4855.32,3290.05 USB2.8 4856.14,3290.86 4856.14,3316.88 4849.99,3323.03
  Inner2 w10: v1(4855.32,3244.88) 4826.33,3273.87 4826.33,3508.56 5121.89,3804.12 5131.89,3804.12 5138.89,3797.12 v1(5160.9,3797.12)
USB_SERIAL_DM: U28.6 USB3.5 USB3.7 | length 524.4
  Top Layer w10: USB3.5 5481.38,3261.64 5490.9,3252.12 ; v1(5482.86,3235.81) 5490.9,3243.85 5490.9,3252.12 ; USB3.7 5520.74,3261.96 5510.9,3252.12 5490.9,3252.12
  Bottom Layer w10: v1(5150.9,3072.12) 5195.9,3072.12 5310.9,3187.12 5434.17,3187.12 v1(5482.86,3235.81)
USB_SERIAL_DP: U28.5 USB3.6 USB3.8 | length 684.7
  Top Layer w10: USB3.6 5501.06,3317.27 5510.9,3327.12 5530.9,3327.12 5540.9,3317.12 5540.9,3291.1 USB3.8 5540.9,3290.15 v1(5540.9,3237.12)
  Bottom Layer w10: v1(5100.9,3073.38) 5127.16,3047.12 5205.9,3047.12 5320.9,3162.12 5465.9,3162.12 v1(5540.9,3237.12)
VBUS: C23.1 C38.1 C39.1 P1_VUSB.1 P5_UART0_5V.1 U18.2 U19.1 U19.3 U28.7 USB2.2 USB2.11 USB3.2 USB3.11 | length 2076.7
  Top Layer w15: 4788.2,3509.42 4788.2,3514.82 4775.9,3527.12 4775.9,3567.12 4791.51,3582.73 4819.39,3582.73 U19.3 ; v1(4920.63,3326.85) 4951.14,3357.36 U18.2 ; USB3.11 5605.4,3316.61 v1(5622.82,3334.04)
  Top Layer w20: USB2.2 4731.65,3326.33 4726.67,3326.35 4700.9,3352.12 4700.9,3450.8 C39.1 4730.32,3451.54 4788.2,3509.42 U19.1 ; U19.3 4890.18,3584.3 4890.9,3583.58 C38.1 4930.9,3636.8 P5_UART0_5V.1 ; USB2.11 v1(4920.63,3326.85) ; v1(5415.9,3327.12) 5416.41,3326.6 USB3.2
  Bottom Layer w10: 5199.95,3283.68 5200.9,3282.73 v1(5200.9,3122.12)
  Bottom Layer w20: v1(4731.67,3326.35) 4732.17,3326.85 4752.08,3326.85 ; P1_VUSB.1 4752.08,3136.98 4752.08,3326.85 ; v1(5622.82,3334.04) 5615.9,3327.12 v1(5415.9,3327.12) 5310.9,3327.12 5267.46,3283.68 5199.95,3283.68 5069.34,3283.68 5015.9,3337.12 4930.9,3337.12 v1(4920.63,3326.85) 4752.08,3326.85
WIFI_EN: U1.45 | length 327.5
  Top Layer w7: U1.45 5588.01,3889.23 v1(5600.9,3902.12)
  Bottom Layer w7: v1(5527.39,4151.03) 5600.9,4077.52 v1(5600.9,3902.12)
pads on no net: U1.1 U1.2 U1.3 U1.6 U1.7 U1.8 U1.9 U1.10 U1.13 U1.15 U1.16 U1.23 U1.26 U1.27 U1.28 U1.29 U1.44 U1.46 U1.47 U1.63 U1.64 U1.65 U1.66 U1.72 U1.73 U1.75 U1.76 U1.77 U1.78 U1.79 U1.81 U1.83 U1.84 U1.85 U1.86 U1.87 U1.88 U6.9 U19.4 U20.4 U21.4 U23.7 U31.4 U31.6 U31.7 U31.9 U31.10 U31.12 U31.13 U31.15 U31.16 U31.17 U31.18 U31.19 U31.20 U31.21 U31.32 U31.33 U31.34 U31.35 USB2.3 USB2.9 USB3.3 USB3.9
copper on no net:
  other v2: 4821.21,4112.44 4860.58,4112.44 4821.21,4151.81 4860.58,4151.81

## Polygon pours and split planes (outlines as drawn)
3V3 on Inner1 (solid, remove dead copper): 4585.9,4447.12 5875.9,4447.12 5875.9,3017.12 4585.9,3017.12
GND on Inner2 (solid, remove dead copper): 4585.9,4447.12 5875.9,4447.12 5875.9,3017.12 4585.9,3017.12
3V3 on Bottom Layer (solid, remove dead copper, pour order 14): 4586.8,4446.49 5871.8,4446.49 5871.8,3016.49 4586.8,3016.49
GND on Top Layer (solid, remove dead copper, pour order 8): 4585.9,4447.12 5875.9,4447.12 5875.9,3017.12 4585.9,3017.12
GND on Bottom Layer (solid, remove dead copper, pour order 10): 5860.89,3620.92 5812.98,3577.12 5796.91,3577.12 5757.44,3622.12 5666.27,3622.12 5666.27,3655.02 5860.9,3654.94
2V5 on Top Layer (solid, remove dead copper, pour order 0): 5603.76,3642.8 5745.53,3642.8 5745.53,3515.76 5713.79,3516.07 5713.79,3583.49 5693.85,3603.43 5603.76,3603.43
2V5 on Top Layer (solid, remove dead copper, pour order 2): 5105.74,3632.95 5105.74,3555.83 5147.37,3555.83 5209.66,3618.12 5241.56,3618.12 5241.56,3627.05 5210.16,3627.05 5180.9,3632.12 5106.57,3632.12
GND on Bottom Layer (solid, remove dead copper, pour order 12): 4840.9,3177.12 4975.9,3312.12 5010.9,3312.12 5035.9,3287.12 5035.9,3067.12 5025.9,3057.12 4870.9,3057.12 4840.9,3087.12
1V1 on Top Layer (solid, remove dead copper, pour order 4): 5584.07,3481.78 5736.24,3481.78 5740.9,3477.12 5741.06,3401.29 5714.25,3401.29 5592.41,3449.89 5584.07,3449.89
3V3 on Top Layer (solid, remove dead copper, pour order 6): 5586.26,4295.91 5586.26,4385.98 5617.53,4385.98 5695.99,4293.05 5695.99,4262.21 5695.9,4262.12 5671.74,4262.12

## Keep-outs
Board Outline Layer:
  lines w3.94: 4588.37,3097.1 4588.37,4369.62 cw(c4667.11,4369.62) 4667.11,4448.36 5792.35,4448.36 cw(c5792.35,4369.62) 5871.09,4369.62 5871.09,3097.1 cw(c5792.35,3097.1) 5792.35,3018.36 4667.11,3018.36 cw(c4667.11,3097.1) 4588.37,3097.1

## Other copper
Top Layer:
  drawing of 194 lines, arcs and shapes, not listed
Inner1:
  region net C6_IO2: 5510.8,3425.14 5517.88,3432.21 5518.74,3431.47 5519.73,3430.85 5521.93,3429.93 5524.31,3429.37 5526.65,3429.1 5513.92,3416.37 5513.65,3418.71 5513.09,3421.09 5512.17,3423.29 5511.55,3424.28
  region net C6_IO2: 5419.99,4211.46 5412.92,4204.39 5412.05,4205.13 5411.07,4205.75 5408.86,4206.68 5406.49,4207.23 5404.14,4207.5 5416.88,4220.24 5417.14,4217.89 5417.7,4215.52 5418.62,4213.31 5419.25,4212.33
  region net C6_EN: 5396.87,4289.07 5389.8,4296.14 5390.54,4297.01 5391.16,4297.99 5392.08,4300.2 5392.64,4302.58 5392.91,4304.92 5405.64,4292.18 5403.3,4291.92 5400.93,4291.36 5398.72,4290.44 5397.74,4289.81
Inner2:
  region net USB_DM: 4789.37,3259.97 4796.44,3252.9 4795.7,3252.03 4795.07,3251.05 4794.15,3248.84 4793.59,3246.47 4793.33,3244.12 4780.59,3256.86 4782.93,3257.13 4785.31,3257.68 4787.52,3258.61 4788.5,3259.23
  region net USB_DP: 4840.23,3252.9 4847.3,3259.97 4848.17,3259.23 4849.15,3258.61 4851.35,3257.68 4853.73,3257.13 4856.07,3256.86 4843.34,3244.12 4843.07,3246.47 4842.51,3248.84 4841.59,3251.05 4840.97,3252.03
  region net USB_DP: 5144.55,3792.12 5144.55,3802.12 5145.69,3802.21 5146.82,3802.46 5149.04,3803.37 5151.11,3804.65 5152.96,3806.13 5152.96,3788.11 5151.11,3789.58 5149.04,3790.87 5146.82,3791.78 5145.69,3792.03
  region net USB_DM: 5144.55,3822.12 5144.55,3832.12 5145.69,3832.21 5146.82,3832.46 5149.04,3833.37 5151.11,3834.65 5152.96,3836.13 5152.96,3818.11 5151.11,3819.58 5149.04,3820.87 5146.82,3821.78 5145.69,3822.03
  region net UART0_RX: 5632.51,3967.12 5632.51,3977.12 5633.65,3977.21 5634.78,3977.46 5637,3978.37 5639.07,3979.65 5640.92,3981.13 5640.92,3963.11 5639.07,3964.58 5637,3965.87 5634.78,3966.78 5633.65,3967.03
  region net UART0_TX: 5658.68,3951.97 5664.44,3943.59 5663.69,3942.73 5663.06,3941.78 5662.1,3939.68 5661.44,3937.43 5661,3935.14 5649.64,3949.12 5652.01,3949.22 5654.48,3949.71 5656.79,3950.62 5657.81,3951.24
  region net UART0_TX: 5108.92,3347.21 5116,3340.14 5115.25,3339.28 5114.63,3338.29 5113.71,3336.09 5113.15,3333.71 5112.88,3331.37 5100.15,3344.1 5102.49,3344.37 5104.87,3344.93 5107.07,3345.85 5108.06,3346.47
  region net UART0_RX: 5195.9,3348.47 5205.9,3348.47 5205.99,3347.33 5206.24,3346.2 5207.15,3343.98 5208.44,3341.91 5209.91,3340.06 5191.89,3340.06 5193.36,3341.91 5194.65,3343.98 5195.56,3346.2 5195.81,3347.33
  region net I2C0_SDA: 5741,4159.1 5733.93,4152.02 5733.06,4152.76 5732.08,4153.39 5729.87,4154.31 5727.5,4154.87 5725.16,4155.14 5737.89,4167.87 5738.16,4165.53 5738.72,4163.15 5739.64,4160.94 5740.26,4159.96
  region net I2C0_SCL: 5407.36,3430.66 5414.44,3423.58 5413.76,3422.78 5413.32,3421.98 5413.05,3421.16 5412.93,3420.31 5412.88,3416.37 5400.15,3429.1 5404.09,3429.15 5404.94,3429.27 5405.76,3429.54 5406.56,3429.98
  region net I2C0_SDA: 5432.36,3423.58 5439.44,3430.66 5440.24,3429.98 5441.04,3429.54 5441.86,3429.27 5442.71,3429.15 5446.65,3429.1 5433.92,3416.37 5433.87,3420.31 5433.75,3421.16 5433.48,3421.98 5433.04,3422.78
Bottom Layer:
  region net C6_IO9: 5004.22,4379.07 5003.6,4368.56 ccw(c5018.45,4357.42) 4999.89,4357.42 4993.64,4374.8 ccw(c4993.64,4390.02)
  region net C6_RXD0: 4782.78,4242.31 4787.84,4223.1 ccw(c4762.7,4197.96) 4774.89,4231.36 4774.89,4255.63 ccw(c4804.86,4264.39)
  region net C6_TXD0: 4789.89,4180.43 4789.89,4170.43 ccw(c4789.89,4151.68) 4774.89,4162.93 4774.89,4187.93 ccw(c4789.89,4199.18)
  region net VBUS: 4742.08,3204.17 4762.08,3204.17 ccw(c4799.58,3204.17) 4777.08,3174.17 4733.64,3174.17 ccw(c4684.53,3204.17)
  region net 2V5: 4863.52,3877.12 4863.72,3857.12 4861.31,3857.03 4859.42,3856.8 4856.51,3856.09 4853.61,3855.37 4851.72,3855.12 4849.31,3855.02 4849.12,3879.03 4851.52,3878.97 4853.41,3878.76 4856.32,3878.1 4859.23,3877.43 4861.12,3877.2
  region net 1V1: 4862.25,3734.11 4862.25,3714.11 4859.61,3714.03 4857.1,3713.8 4852.72,3713.11 4849.5,3712.42 4847.84,3712.11 4847.84,3736.12 4849.5,3735.81 4852.72,3735.12 4857.1,3734.43 4859.61,3734.2
  region net SD_CK: 5415.9,3938.47 5425.9,3938.47 5425.99,3937.33 5426.24,3936.2 5427.15,3933.98 5428.44,3931.91 5429.91,3930.06 5411.89,3930.06 5413.36,3931.91 5414.65,3933.98 5415.56,3936.2 5415.81,3937.33
  region net SD_D1: 5365.9,3938.47 5375.9,3938.47 5375.99,3937.33 5376.24,3936.2 5377.15,3933.98 5378.44,3931.91 5379.91,3930.06 5361.89,3930.06 5363.36,3931.91 5364.65,3933.98 5365.56,3936.2 5365.81,3937.33
  region net SD_D3: 5465.9,3938.47 5475.9,3938.47 5475.99,3937.33 5476.24,3936.2 5477.15,3933.98 5478.44,3931.91 5479.91,3930.06 5461.89,3930.06 5463.36,3931.91 5464.65,3933.98 5465.56,3936.2 5465.81,3937.33
  region net SPI0_MISO: 4881,4234.1 4873.92,4227.02 4873.06,4227.76 4872.07,4228.39 4869.87,4229.31 4867.49,4229.87 4865.15,4230.14 4877.88,4242.87 4878.15,4240.53 4878.71,4238.15 4879.63,4235.94 4880.25,4234.96
  region net SPI0_MOSI: 4762.62,4028.52 4769.69,4021.45 4768.95,4020.58 4768.33,4019.6 4767.4,4017.39 4766.84,4015.02 4766.58,4012.67 4753.84,4025.41 4756.19,4025.67 4758.56,4026.23 4760.77,4027.16 4761.75,4027.78
  region net SPI0_CLK: 4802.74,4028.4 4809.81,4021.33 4809.07,4020.46 4808.45,4019.48 4807.52,4017.27 4806.96,4014.9 4806.7,4012.55 4793.96,4025.29 4796.31,4025.55 4798.68,4026.11 4800.89,4027.04 4801.87,4027.66
  region net 2V5: 5174.52,3635.38 5188.66,3621.23 5186.85,3619.3 5185.24,3617.37 5182.63,3613.78 5180.85,3611.02 5179.9,3609.63 5162.91,3626.61 5164.31,3627.56 5167.07,3629.35 5170.66,3631.96 5172.59,3633.57
  region net 2V5: 5580.13,3626.23 5594.27,3640.38 5596.21,3638.57 5598.14,3636.96 5601.72,3634.35 5604.49,3632.56 5605.88,3631.61 5588.9,3614.63 5587.95,3616.02 5586.16,3618.78 5583.55,3622.37 5581.94,3624.3
  region net SPI_LCD_CD: 5645.66,3520.63 5650.61,3525.58 5651.25,3525.2 5652.03,3525.11 5653.88,3525.48 5655.83,3526.11 5656.76,3526.33 5657.59,3526.39 5644.86,3513.65 5644.92,3514.49 5645.14,3515.41 5645.76,3517.37 5646.14,3519.21 5646.05,3520
  region net 1V1: 5127.47,3683.16 5107.47,3682.94 5107.38,3685.35 5107.15,3687.24 5106.44,3690.14 5105.71,3693.05 5105.46,3694.94 5105.35,3697.35 5129.37,3697.57 5129.31,3695.16 5129.1,3693.28 5128.44,3690.37 5127.78,3687.46 5127.56,3685.57
  region net 1V1: 5100.1,3700.58 5114.24,3714.72 5116.17,3712.91 5118.11,3711.3 5121.69,3708.69 5124.46,3706.9 5125.85,3705.95 5108.87,3688.97 5107.92,3690.36 5106.13,3693.13 5103.52,3696.71 5101.91,3698.64
  region net WIFI_EN: 5597.4,3918.47 5604.4,3918.47 5604.52,3917.04 5604.87,3915.84 5605.42,3914.8 5606.12,3913.87 5607.88,3912.11 5609.91,3910.06 5591.89,3910.06 5593.92,3912.11 5595.68,3913.87 5596.38,3914.8 5596.93,3915.84 5597.28,3917.04
  region net WIFI_EN: 5541.43,4141.94 5536.48,4136.99 5535.38,4137.92 5534.28,4138.52 5533.17,4138.87 5532.01,4139.02 5529.52,4139.03 5526.64,4139.04 5539.38,4151.78 5539.39,4148.9 5539.4,4146.41 5539.55,4145.25 5539.9,4144.14 5540.5,4143.04
  region net 1V1: 5567.51,3571.1 5567.51,3591.1 5570.15,3591.19 5572.66,3591.42 5577.04,3592.11 5580.26,3592.8 5581.92,3593.11 5581.92,3569.1 5580.26,3569.41 5577.04,3570.1 5572.66,3570.79 5570.15,3571.02
  region net SPI1_MOSI: 5560.82,3760.68 5561.51,3771.27 5562.16,3772.05 5562.73,3772.97 5563.7,3775.06 5564.57,3777.23 5565.49,3779.17 5571.27,3762.12 5570.01,3762.54 5568.64,3762.8 5567.21,3762.89 5565.77,3762.81 5564.36,3762.56 5563.03,3762.12 5561.84,3761.5
  region net SPI1_CS: 5589.2,3829.2 5594.57,3822.2 5593.23,3822.06 5591.97,3821.66 5590.8,3821.04 5589.7,3820.23 5587.77,3818.21 5586.17,3815.89 5580.79,3833.09 5582.69,3832.07 5584.92,3830.78 5587.19,3829.67 5588.24,3829.33
  region net USB_SERIAL_DM: 5474.84,3220.72 5467.76,3227.79 5468.5,3228.66 5469.13,3229.64 5470.05,3231.85 5470.61,3234.22 5470.88,3236.56 5483.61,3223.83 5481.27,3223.56 5478.89,3223 5476.68,3222.08 5475.7,3221.46
  region net USB_SERIAL_DP: 5532.88,3222.02 5525.8,3229.1 5526.55,3229.96 5527.17,3230.94 5528.09,3233.15 5528.65,3235.53 5528.92,3237.87 5541.65,3225.14 5539.31,3224.87 5536.93,3224.31 5534.73,3223.39 5533.74,3222.76
  region net USB_SERIAL_DP: 5116,3065.36 5108.92,3058.28 5108.06,3059.03 5107.07,3059.65 5104.87,3060.57 5102.49,3061.13 5100.15,3061.4 5112.88,3074.13 5113.15,3071.79 5113.71,3069.41 5114.63,3067.21 5115.25,3066.22
  region net VBUS: 4906.22,3316.85 4906.22,3336.85 4908.87,3336.94 4911.37,3337.17 4915.75,3337.86 4918.97,3338.55 4920.63,3338.86 4920.63,3314.85 4918.97,3315.16 4915.75,3315.85 4911.37,3316.54 4908.87,3316.77
  region net VBUS: 5195.9,3138.47 5205.9,3138.47 5205.99,3137.33 5206.24,3136.2 5207.15,3133.98 5208.44,3131.91 5209.91,3130.06 5191.89,3130.06 5193.36,3131.91 5194.65,3133.98 5195.56,3136.2 5195.81,3137.33
  region net VBUS: 5401.49,3317.12 5401.49,3337.12 5404.14,3337.21 5406.64,3337.43 5411.02,3338.12 5414.24,3338.81 5415.9,3339.13 5415.9,3315.11 5414.24,3315.43 5411.02,3316.12 5406.64,3316.81 5404.14,3317.03
  region net VBUS: 5430.31,3337.12 5430.31,3317.12 5427.66,3317.03 5425.16,3316.81 5420.78,3316.12 5417.56,3315.43 5415.9,3315.11 5415.9,3339.13 5417.56,3338.81 5420.78,3338.12 5425.16,3337.43 5427.66,3337.21
  region net VBUS: 5611.33,3317.12 5603.1,3337.12 5604.56,3337 5605.93,3336.73 5608.31,3336.17 5609.32,3336.1 5610.19,3336.32 5610.92,3336.94 5611.51,3338.07 5619.73,3322.43 5618.9,3322.58 5618.2,3322.57 5617.6,3322.41 5617.09,3322.14 5616.27,3321.31 5615.59,3320.25 5614.91,3319.14 5614.06,3318.13 5612.92,3317.4 5612.19,3317.19
  region net C6_IO2: 5734.8,3357.51 5741.88,3364.58 5742.74,3363.84 5743.73,3363.22 5745.93,3362.29 5748.31,3361.73 5750.65,3361.47 5737.92,3348.73 5737.65,3351.08 5737.09,3353.45 5736.17,3355.66 5735.55,3356.64
  region net UART2_TX: 5817.92,3304.26 5825,3297.19 5824.25,3296.33 5823.63,3295.34 5822.71,3293.14 5822.15,3290.76 5821.88,3288.42 5809.15,3301.15 5811.49,3301.42 5813.87,3301.98 5816.07,3302.9 5817.06,3303.52
  region net UART2_RX: 5794.8,3357.19 5801.88,3364.26 5802.74,3363.52 5803.73,3362.9 5805.93,3361.98 5808.31,3361.42 5810.65,3361.15 5797.92,3348.42 5797.65,3350.76 5797.09,3353.14 5796.17,3355.34 5795.55,3356.33
  region net C6_EN: 5744.9,3305.52 5754.9,3305.52 5754.99,3304.38 5755.24,3303.25 5756.15,3301.03 5757.44,3298.96 5758.91,3297.11 5740.89,3297.11 5742.36,3298.96 5743.65,3301.03 5744.56,3303.25 5744.81,3304.38
  region net C6_EN: 5493.53,3404.49 5483.53,3404.49 5483.44,3405.51 5483.18,3406.34 5482.79,3407.03 5482.27,3407.62 5480.99,3408.76 5479.52,3410.19 5497.53,3410.19 5496.06,3408.76 5494.78,3407.62 5494.27,3407.03 5493.87,3406.34 5493.62,3405.51
  region net C6_IO2: 5538.75,3401.34 5524.1,3401.85 5521.22,3404.93 5519.69,3406.53 5518.23,3407.88 5535.68,3410.16 5535.06,3408.99 5534.83,3407.84 5534.95,3406.7 5535.35,3405.59 5535.99,3404.5 5536.81,3403.43
  region net UART2_TX: 5567.23,3432.17 5574.3,3425.1 5573.56,3424.23 5572.94,3423.25 5572.02,3421.04 5571.46,3418.66 5571.19,3416.32 5558.45,3429.06 5560.8,3429.32 5563.17,3429.88 5565.38,3430.8 5566.36,3431.43
  region net SD_D2: 5187.36,4375.65 5194.44,4368.58 5193.76,4367.78 5193.32,4366.98 5193.05,4366.16 5192.93,4365.31 5192.88,4361.37 5180.15,4374.1 5184.09,4374.15 5184.94,4374.27 5185.76,4374.54 5186.56,4374.98
  region net SD_D1: 5077.25,4282.12 5077.25,4272.12 5076.11,4272.03 5074.98,4271.78 5072.76,4270.87 5070.69,4269.58 5068.84,4268.11 5068.84,4286.13 5070.69,4284.65 5072.76,4283.37 5074.98,4282.46 5076.11,4282.21
  region net SD_D0: 5074.92,4315.34 5079.46,4305.34 5078.34,4305.24 5077.16,4304.94 5074.78,4303.86 5072.64,4302.34 5071.76,4301.49 5071.05,4300.6 5066.51,4318.03 5068.53,4317.05 5070.6,4316.18 5072.72,4315.57
  region net SD_CK: 5077.25,4345.11 5077.25,4335.11 5076.11,4335.02 5074.98,4334.77 5072.76,4333.86 5070.69,4332.58 5068.84,4331.11 5068.84,4349.12 5070.69,4347.65 5072.76,4346.36 5074.98,4345.46 5076.11,4345.2
  region net $1N25036: 5097.9,4420.17 5109.7,4418.27 5111.41,4416.89 5113.23,4415.83 5115.11,4414.85 5116.99,4413.67 5099.4,4409.79 5099.89,4410.97 5100.17,4412.3 5100.24,4413.73 5100.12,4415.19 5099.82,4416.62 5099.34,4417.97 5098.7,4419.17
  region net $1N25036: 4824.98,4406.15 4829.93,4401.2 4829.01,4400.11 4828.41,4399.01 4828.06,4397.89 4827.9,4396.74 4827.9,4394.24 4827.88,4391.37 4815.15,4404.1 4818.02,4404.12 4820.52,4404.12 4821.67,4404.28 4822.79,4404.63 4823.89,4405.23
  region net C6_TXD0: 4940.8,4165.14 4947.88,4172.21 4948.74,4171.47 4949.73,4170.85 4951.93,4169.93 4954.31,4169.37 4956.65,4169.1 4943.92,4156.37 4943.65,4158.71 4943.09,4161.09 4942.17,4163.29 4941.55,4164.28
  region net 2V5: 5280.9,3752.12 ccw(c5280.9,3652.12) 5220.9,3732.12 5210.9,3762.12 5220.9,3792.12 ccw(c5280.9,3872.12) 5280.9,3772.12
  region net VBUS: 5195.9,3213.68 ccw(c5111.4,3213.68) 5170.9,3273.68 5199.95,3283.68 5230.9,3273.68 ccw(c5290.4,3213.68) 5205.9,3213.68

## Silkscreen, mask and mechanical layers (free items; w line width, h text height)
Top Silkscreen Layer:
  text "CS MI" at 4655.9,4147.12 h40 r90
  text "SCL SDA" at 5835.9,4077.12 h30 r90
  text "MO CK" at 4655.9,3987.12 h40 r90
  text "3.3 TX RX G" at 5835.9,3857.12 h30 r90
  text "E6" at 5685.9,3797.12 h30 r90
  text "E12 E11" at 5835.9,3722.12 h30 r90
  text "5v" at 4955.9,3672.12 h40 r90
  text "3.3v" at 5065.9,3427.12 h40 r90
  text "T2 D11 / R2 D12" at 5830.9,3262.12 h30 r180
  text "Host" at 5065.9,3042.12 h50 r90
  text "Serial" at 5745.9,3042.12 h50 r90
Bottom Silkscreen Layer:
  text "IO9 / WiFi" at 4860.9,4317.12 h40 r270
  text "F1c200s / 64mb RAM / 128mb NAND / Wi-Fi 6" at 5815.9,4272.12 h50 r90
  text "IO2 EN / WiFi" at 5295.9,4207.12 h40 r270
  text "T0 R0 / WiFi" at 4625.9,4152.12 h40 r270
  text "200micron" at 4730.9,3887.12 h100 r90
  text "by Ari Stehney" at 4795.9,3867.12 h60 r90
  text "SPI LCD" at 5855.9,3527.12 h50
  text "VBUS GND" at 4720.9,3227.12 h40 r180